# Altium PCB Sensorless_BLDC_PCB.PcbDoc
Units mm, origin at the board's own origin, x right, y up, seen from the top; angles counter-clockwise.
Board outline 92 x 49 mm, 2 copper layers (Top Layer, Bottom Layer); 49 components, 34 nets, 140 pads, 138 vias.
Unrouted connection lines stored in the file: 2.
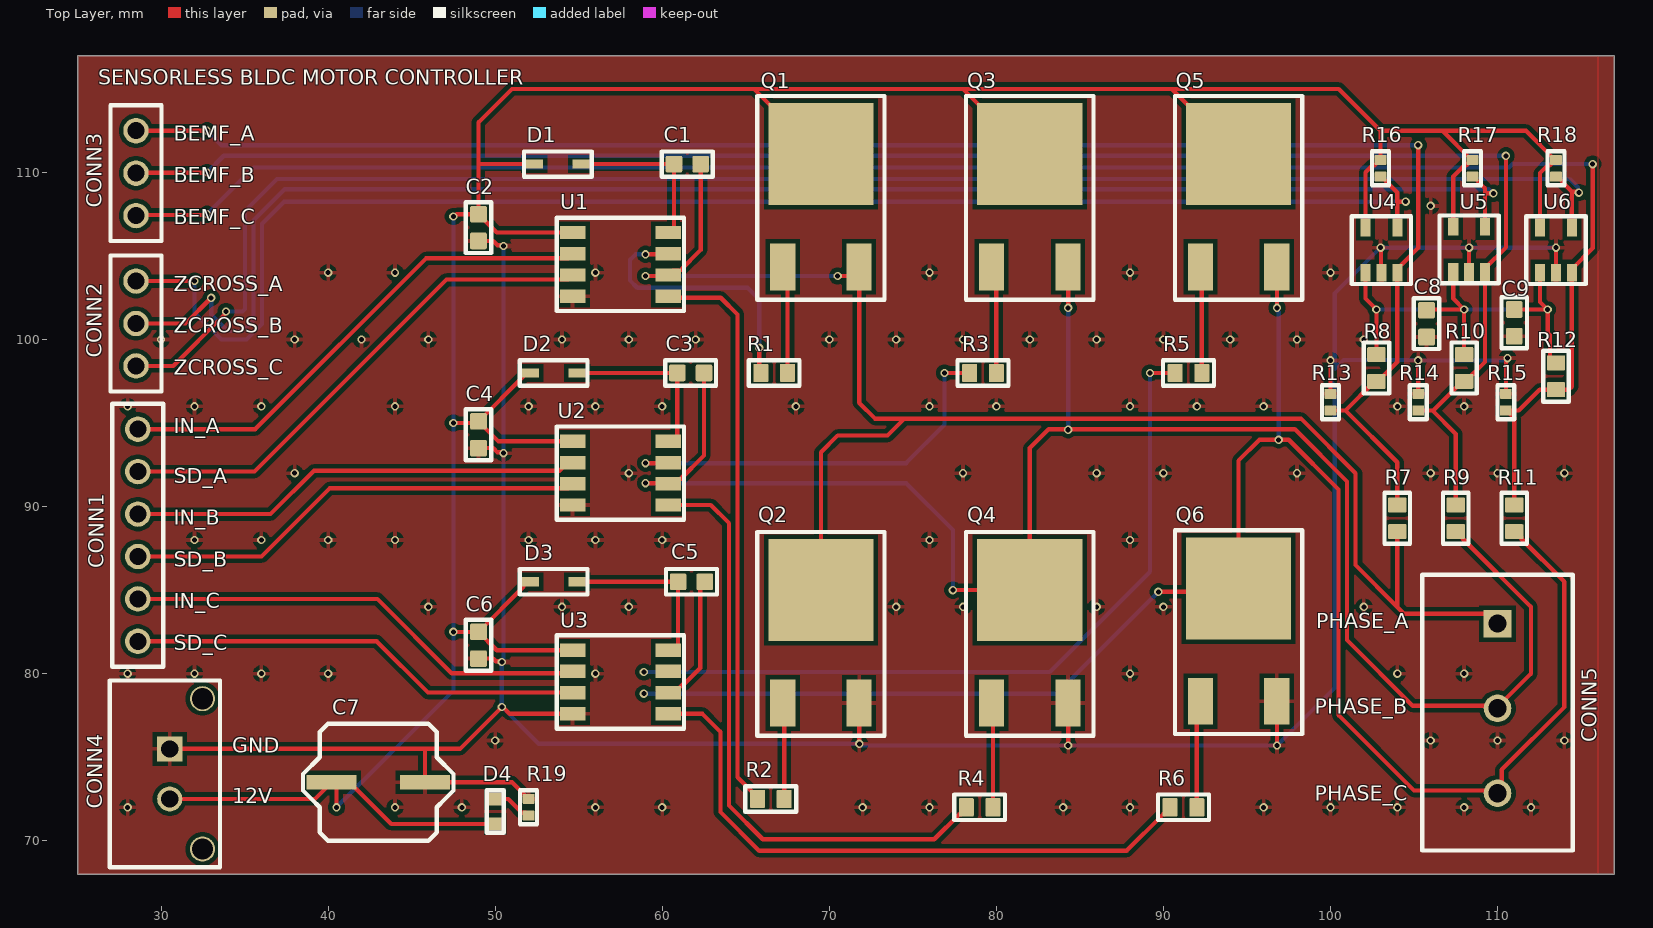
[diagram p0: Top Layer view]
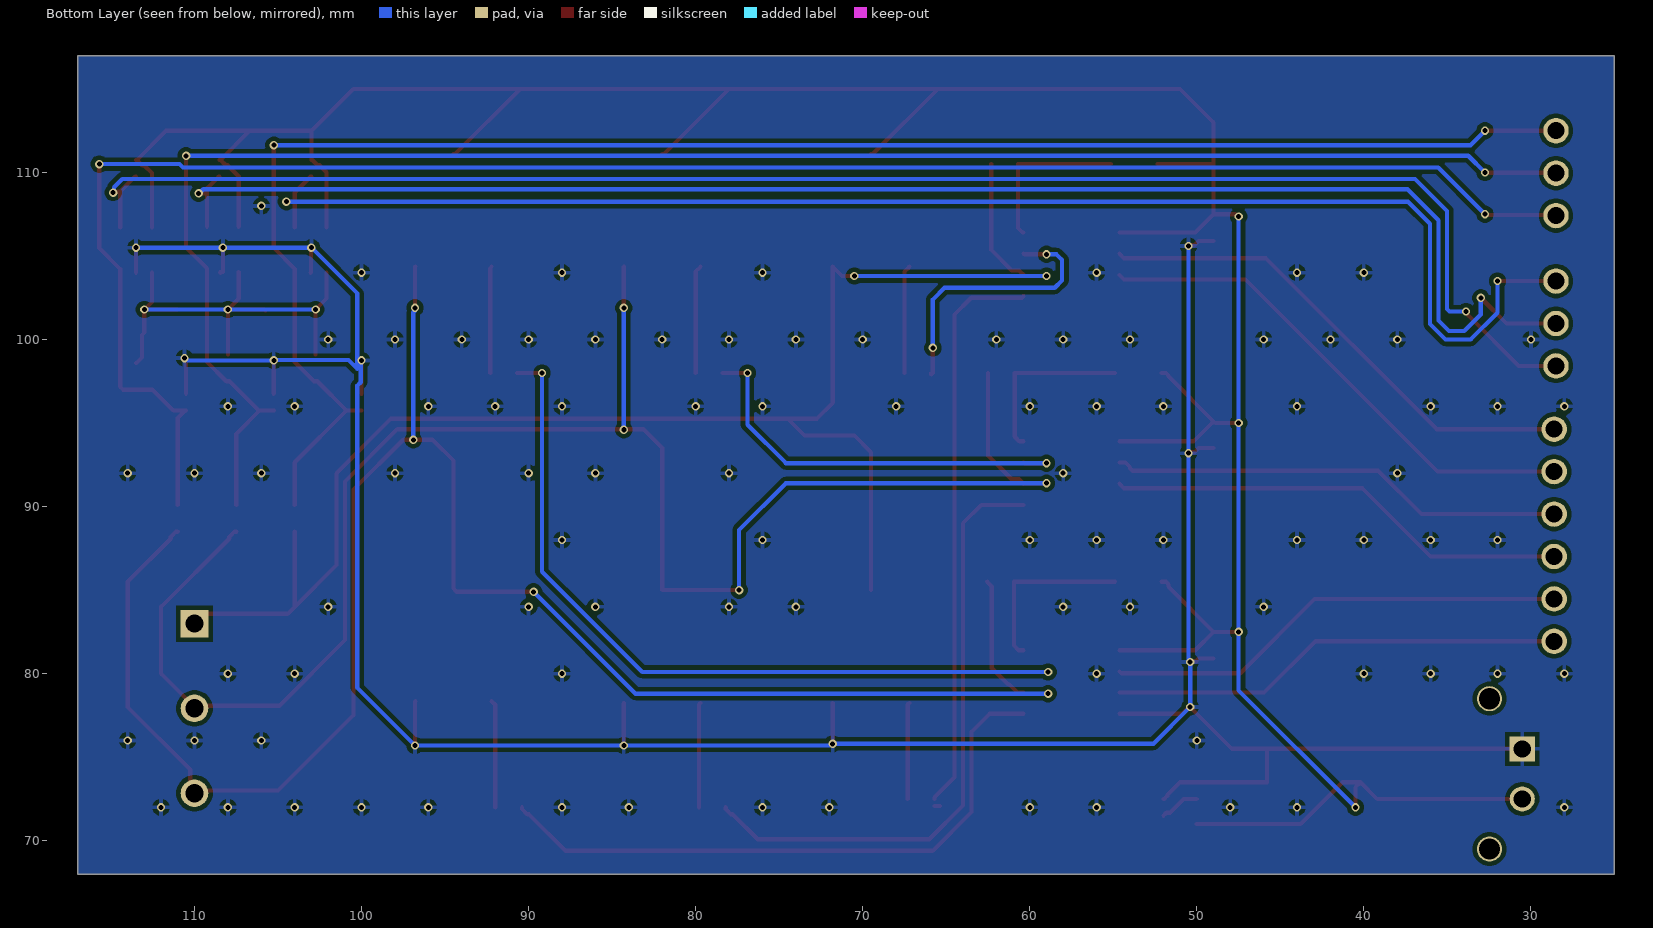
[diagram p1: Bottom Layer view, seen from below]
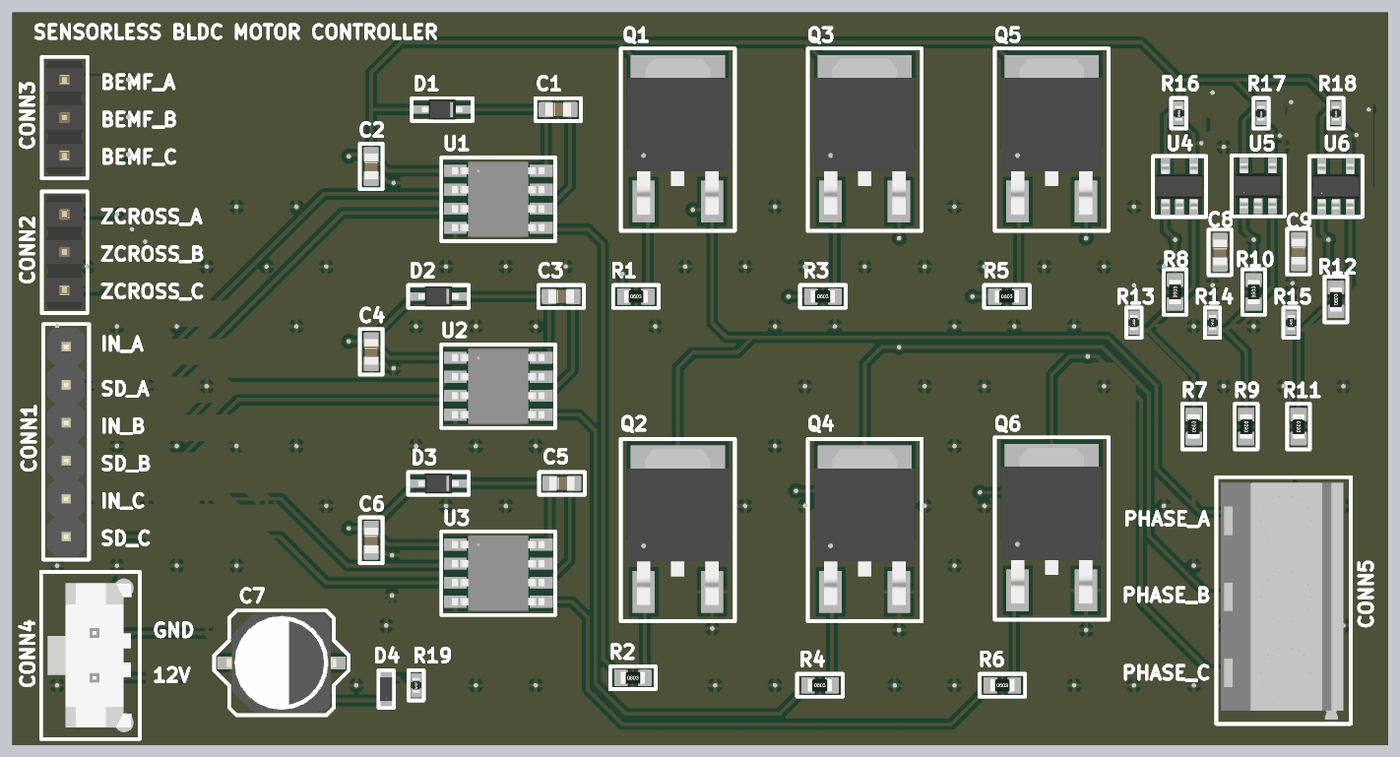
[diagram p2: 3D render of the assembled board from above, using the file's embedded part models]

## Layer stack, top to bottom
Top Solder: solder mask 0.0102, Solder Resist, Dk 3.5
Top Layer: signal copper 0.0356
Dielectric 1: dielectric 0.32, FR-4, Dk 4.8
Bottom Layer: signal copper 0.0356
Bottom Solder: solder mask 0.0102, Solder Resist, Dk 3.5

## Board outline
25,68 117,68 117,117 25,117

## Design rules (kind name [scope] priority, off if disabled: settings)
Clearance [All] p1: gap=0.254 ignorepadtopadclearanceinfootprint=FALSE except(0: Arc-Hole Track-Hole SMDPad-Hole THPad-Hole Via-Hole Fill-Hole Poly-Hole Region-Hole Text-Hole)
PolygonConnect [All] p1: connectstyle=Relief reliefconductorwidth=0.254 reliefentries=4 polygonreliefangle="90 Angle" airgapwidth=0.254
RoutingVias [All] p1: holewidth=0.711 width=1.27 viastyle="Through Hole" minholewidth=0.711 minwidth=1.27 maxholewidth=0.711 maxwidth=1.27
SolderMaskExpansion [All] p1: expansion=0.102 istentingtop=TRUE
Width [All] p1: maxlimit=0.254 minlimit=0.254 preferedwidth=0.254
30 further rules are at their usual default settings.

## Classes and differential pairs
component class ZeroCrossDetection: C8 C9 R7 R8 R9 R10 R11 R12 R13 R14 R15 R16 R17 R18 U4 U5 U6
component class HBridgeControl: C1 C2 C3 C4 C5 C6 C7 CONN1 CONN2 CONN3 CONN4 D1 D2 D3 D4 Q1 Q2 Q3 Q4 Q5 Q6 R1 R2 R3 R4 R5 R6 R19 U1 U2 U3

## Components (designator, comment, footprint, x,y, rotation, side; value= is the part's Value field where it differs from the comment)
C1 "GCM188R71E105KA64D" CAP0603 61.5,110.5 r0 top value=1μF
C2 "GRM188R61E106MA73J" CAP0603 49,106.7 r270 top value=10μF
C3 "GCM188R71E105KA64D" CAP0603 61.7,98 r0 top value=1μF
C4 "GRM188R61E106MA73J" CAP0603 49,94.3 r270 top value=10μF
C5 "GCM188R71E105KA64D" CAP0603 61.75,85.5 r0 top value=1μF
C6 "GRM188R61E106MA73J" CAP0603 49,81.7 r270 top value=10μF
C7 "EEE-1VA101XP" SMD 43,73.5 r0 top
C8 "GRM188R61E106MA73J" CAP0603 105.75,100.95 r270 top value=10μF
C9 "GRM188R61E106MA73J" CAP0603 111,101 r270 top value=10μF
CONN1 "MALE6PINCONN" "6POS HEADER" 28.608,94.633 r270 top
CONN2 "MALE3PINCONN" "3POS HEADER" 28.5,103.5 r270 top
CONN3 "MALE3PINCONN" "3POS HEADER" 28.5,112.5 r270 top
CONN4 "MALE2PINCONN" "2POS HEADER" 31.5,74 r90 top
CONN5 "SCREW3PINCONN" SCREW3POSCONN 110,77.92 r90 top
D1 "1N4148WS" SOD_323 53.75,110.5 r0 top
D2 "1N4148WS" SOD_323 53.5,98 r0 top
D3 "1N4148WS" SOD_323 53.5,85.5 r0 top
D4 "B1911PG--20D000514U1930" LED0603 50,71.75 r90 top
Q1 "IRLR7843TRPBF" "TO-252AA (DPAK)" 69.5,109.5 r0 top
Q2 "IRLR7843TRPBF" "TO-252AA (DPAK)" 69.5,83.398 r0 top
Q3 "IRLR7843TRPBF" "TO-252AA (DPAK)" 82,109.5 r0 top
Q4 "IRLR7843TRPBF" "TO-252AA (DPAK)" 82,83.398 r0 top
Q5 "IRLR7843TRPBF" "TO-252AA (DPAK)" 94.5,109.5 r0 top
Q6 "IRLR7843TRPBF" "TO-252AA (DPAK)" 94.5,83.5 r0 top
R1 "RC0402JR-0710KL_1" RES0603 66.7,98 r0 top value=100Ω
R2 "RC0402JR-0710KL_1" RES0603 66.5,72.5 r0 top value=100Ω
R3 "RC0402JR-0710KL_1" RES0603 79.2,98 r0 top value=100Ω
R4 "RC0402JR-0710KL_1" RES0603 79,72 r0 top value=100Ω
R5 "RC0402JR-0710KL_1" RES0603 91.5,98 r0 top value=100Ω
R6 "RC0402JR-0710KL_1" RES0603 91.2,72 r0 top value=100Ω
R7 "RT0603BRD0733KL" RES0603 104,89.3 r90 top value=33kΩ
R8 "RT0603BRD0733KL" RES0603 102.75,98.3 r90 top value=33kΩ
R9 "RT0603BRD0733KL" RES0603 107.5,89.3 r90 top value=33kΩ
R10 "RT0603BRD0733KL" RES0603 108,98.3 r90 top value=33kΩ
R11 "RT0603BRD0733KL" RES0603 111,89.3 r90 top value=33kΩ
R12 "RT0603BRD0733KL" RES0603 113.5,97.8 r90 top value=33kΩ
R13 "RC0402JR-0710KL" RES0402 100,96.25 r90 top value=10kΩ
R14 "RC0402JR-0710KL" RES0402 105.25,96.25 r90 top value=10kΩ
R15 "RC0402JR-0710KL" RES0402 110.5,96.25 r90 top value=10kΩ
R16 "RC0402JR-0710KL" RES0402 103,110.25 r90 top value=10kΩ
R17 "RC0402JR-0710KL" RES0402 108.5,110.25 r90 top value=10kΩ
R18 "RC0402JR-0710KL" RES0402 113.5,110.25 r90 top value=10kΩ
R19 "RC0402JR-0710KL" RES0402 52,72 r90 top value=10kΩ
U1 "DGD2104MS8-13" 8SO 57.5,104.5 r0 top
U2 "DGD2104MS8-13" 8SO 57.5,92 r0 top
U3 "DGD2104MS8-13" 8SO 57.5,79.5 r0 top
U4 "LM393DR" SOT25 103.05,105.354 r90 top
U5 "LM393DR" SOT25 108.3,105.396 r90 top
U6 "LM393DR" SOT25 113.5,105.354 r90 top

## Footprints (in the part's own frame and the unit in brackets; to place one, negate y for a bottom-side part, rotate by r counter-clockwise, add the part's x,y. Pads: shape width x height; smd on the part's side, far side on the other; paste and mask are expansions set on the pad)
"2POS HEADER" [mm] "2 male connectors"
  round 1.5 hole 1.02: 1(-1.5,0.98)
  rect 1.5x1.5 hole 1.02: 2(1.5,0.98)
  round 1.5 hole 1.27: ""(-4.5,-0.98) ""(4.5,-0.98)
  silkscreen extent -5.59,-2.03 5.59,4.57, body extent -4.82,-1.47 4.82,4.14, height 9.95
"3POS HEADER" [mil]
  round 60 hole 40.16: 1(0,0) 2(100,0) 3(200,0)
  silkscreen extent -60,-60 260,60, body extent -50,-49 250,49, height 450
"6POS HEADER" [mil] "CONN HEADER VERT 6POS 2.54MM"
  round 60 hole 40.16: 1(0,0) 2(100,0) 3(200,0) 4(300,0) 5(400,0) 6(500,0)
  silkscreen extent -60,-60 560,60, body extent -50,-49 550,49, height 335
8SO [mil] "Surface mount IC 6.5x4.612mm"
  rect 60x31.57 smd: 1(-112.95,75) 2(-112.95,25) 3(-112.95,-25) 4(-112.95,-75) 5(112.95,-75) 6(112.95,-25) 7(112.95,25) 8(112.95,75)
  silkscreen extent -150,-110 150,110, body extent -122,-99 122,99, height 69
CAP0603 [mm] "0.063\" L x 0.031\" W (1.60mm x 0.80mm)"
  rrect20% 1x1 smd: 1(-0.8,0) 2(0.8,0)
  silkscreen extent -1.52,-0.76 1.52,0.76, body extent -0.85,-0.44 0.85,0.44, height 0.89
LED0603 [mm] "0603 LED"
  rect 0.8x0.8 smd: 1(-0.75,0) 2(0.75,0)
  silkscreen extent -1.27,-0.51 1.27,0.51, body extent -0.8,-0.41 0.8,0.41, height 0.61
RES0402 [mm] "Chip Resistor, Body 1x0.5mm, IPC Medium Density"
  rrect15% 0.6x0.7 smd: 1(-0.5,0) 2(0.5,0)
  silkscreen extent -1.02,-0.51 1.02,0.51, body extent -0.5,-0.25 0.5,0.25, height 0.27
RES0603 [mm] "Chip Resistor, Body 1.6x0.8mm, IPC Medium Density"
  rrect15% 0.9x1.1 smd: 1(-0.8,0) 2(0.8,0)
  silkscreen extent -1.52,-0.76 1.52,0.76, body extent -0.8,-0.4 0.8,0.4, height 0.46
SCREW3POSCONN [mm] "3 Position Wire to Board Terminal Block Horizontal with Board 0.200\" (5.08mm) Through Hole"
  rect 1.65x1.65 hole 1.1: 1(5.08,0)
  round 1.65 hole 1.1: 2(0,0) 3(-5.08,0)
  silkscreen extent -8.5,-4.5 8,4.5, body extent -8.22,-4 7.62,4.2, height 10.25
SMD [mm] "0.260\" L x 0.260\" W (6.60mm x 6.60mm)"
  rect 3x0.85 smd: 1(-2.794,0) 2(2.794,0)
  silkscreen extent -4.5,-3.5 4.5,3.5, body extent -3.65,-3.3 3.65,3.3, height 7.7
SOD_323 [mm] "Surface mount diode 1.05x0.55 mm"
  rect 1.05x0.55 smd: 1(-1.4,0) 2(1.4,0)
  silkscreen extent -2.03,-0.76 2.03,0.76, body extent -1.35,-0.67 1.35,0.67, height 0.89
SOT25 [mm]
  rect 1.05x0.6 smd: 1(-1.354,0.95) 2(-1.354,0) 3(-1.354,-0.95) 4(1.354,-0.95) 5(1.354,0.95)
  silkscreen extent -2.03,-1.78 2.03,1.78, body extent -1.5,-1.55 1.5,1.55, height 1.45
"TO-252AA (DPAK)" [mm] "Mofset Footprint"
  rect 1.5x2.8 smd: 1(-2.286,-5.15) 3(2.286,-5.15)
  rect 6.3x6.1 smd: 2(0,1.603)
  silkscreen extent -3.81,-7.11 3.81,5.08, body extent -3.37,-6.03 3.37,4.38, height 2.39

## Part data
C1 C3 C5: "CAP CER 1UF 25V X7R 0603", Manufacturer 1=Murata, Manufacturer Part Number 1=GCM21BR71E105KA56L, Supplier Part Number 1=490-4785-1-ND, Voltage Rating=25V, Supplier 1=Digi-Key
C2 C4 C6 C8 C9: "CAP CER 10UF 25V X5R 0603", Manufacturer 1=Murata, Manufacturer Part Number 1=GCM21BR71E105KA56L, Supplier Part Number 1=490-4785-1-ND, Voltage Rating=25V, Supplier 1=Digi-Key
C7: "CAP ALUM 100UF 20% 35V SMD", Capacitance=100uF, Voltage Rating=35V
D1 D2 D3: "DIODE GEN PURP 75V 150MA SOD323F", Manufacturer=Onsemi, Supplier Part Number=1N4148WSFSTR-ND, Manufacturer Part Number=1N4148WS, Supplier=DigiKey
D4: "LED GREEN DIFFUSED 0603 SMD"
Q1 Q2 Q3 Q4 Q5 Q6: "N-Channel 30 V 161A (Tc) 140W (Tc) Surface Mount TO-252AA (DPAK)", Manufacturer="Infineon Technologies", Supplier Part Number=IIRLR7843PBFTR-ND, Manufacturer Part Number=IRLR7843TRPBF, Supplier=DigiKey
R1 R2 R3 R4 R5 R6: "RES 100 OHM 1% 1/10W 0603", Manufacturer 1="Stackpole Electronics Inc", Manufacturer Part Number 1=RNCP0603FTD10K0, Power Rating=1/8W, Supplier Part Number 1=RNCP0603FTD10K0CT-ND, Supplier 1=Digi-Key
R7 R8 R9 R10 R11 R12: "RES SMD 33K OHM 0.1% 1/10W 0603", Manufacturer 1="Stackpole Electronics Inc", Manufacturer Part Number 1=RNCP0603FTD10K0, Power Rating=1/8W, Supplier Part Number 1=RNCP0603FTD10K0CT-ND, Supplier 1=Digi-Key
R13 R14 R15 R16 R17 R18 R19: "RES 10K OHM 5% 1/16W 0402", Manufacturer 1="Stackpole Electronics Inc", Manufacturer Part Number 1=RNCP0603FTD10K0, Power Rating=1/8W, Supplier Part Number 1=RNCP0603FTD10K0CT-ND, Supplier 1=Digi-Key
U1 U2 U3: "IC GATE DRVR HALF-BRIDGE 8-SO", Manufacturer="Diodes Incorporated", Supplier Part Number=DGD2104MS8-13DITR-ND, Manufacturer Part Number=DGD2104MS8-13, Supplier=DigiKey
U4 U5 U6: Manufacturer="Texas Instruments", Supplier Part Number=296-1015-2-ND, Manufacturer Part Number=LM393DR, Supplier=DigiKey

## Via types
v1: diameter 0.5, hole 0.3, Top Layer to Bottom Layer, tented both sides, 138 vias

## Nets (pads, with @x,y where several pads share a name; then routed paths per layer and width w, separated by ;. In a path a pad name is that pad's centre, name@x,y a point inside that pad or via, vN(x,y) a via of type N, cw(c..) or ccw(c..) an arc to the next point about the centre after c; other vN are vias at no path point)
12V: C2.1 C4.1 C6.1 C7.1 CONN4.1 D1.1 D2.1 D3.1 D4.1 Q1.2 Q3.2 Q5.2 R16.2 R17.2 R18.2 U1.1 U2.1 U3.1 U4.5 U5.5 U6.5 | length 202.9
  Top Layer w0.254: CONN4.1 39.206,72.5 C7.1 ; v1(40.5,72) 40.5,73.206 C7.1 ; v1(47.5,82.5) C6.1 ; v1(47.5,95) C4.1@48.9,95 ; v1(47.5,107.369) 47.567,107.369 47.698,107.5 C2.1 ; D4.1 43.781,71 41.281,73.5 C7.1 ; D3.1 51.85,85.5 51.702,85.352 51.702,85.202 C6.1 ; D2.1 51.85,98 51.702,97.852 51.702,97.802 C4.1 50.195,93.905 U2.1 ; D1.1 49,110.5 ; U3.1 50.095,81.405 C6.1 ; U1.1 50.095,106.405 C2.1 ; Q1.2 69.4,111.103 65.503,115 ; Q3.2 81.9,111.103 78.003,115 ; Q5.2 94.4,111.103 90.503,115 ; U4.5 102.1,110.012 102.519,110.431 102.631,110.431 102.95,110.75 R16.2 103,112.5 ; U5.5 107.35,109.762 108.019,110.431 108.131,110.431 R17.2@108.45,110.75 ; R17.2 R17.2@108.45,110.75 ; U6.5 112.55,109.962 113.019,110.431 113.131,110.431 R18.2@113.45,110.75 ; R18.2 R18.2@113.45,110.75 ; C2.1 49,110.5 ; 49,110.5 49,113 51,115 65.503,115 ; 65.503,115 69.5,115 78.003,115 ; 78.003,115 90.503,115 ; 90.503,115 100.5,115 103,112.5 ; 103,112.5 106.7,112.5 ; 106.7,112.5 111.7,112.5 R18.2@113.45,110.75 ; 106.7,112.5 R17.2@108.45,110.75
  Bottom Layer w0.254: v1(40.5,72) 47.5,79 v1(47.5,82.5) v1(47.5,107.369)
BEMF_A: CONN3.1 R7.2 R8.1 R13.1 U4.3 | length 102.7
  Top Layer w0.254: CONN3.1 v1(32.75,112.5) ; R13.1 100.9,95.75 ; R7.2 104,92.65 100.9,95.75 ; v1(105.25,111.631) 105.25,105.475 104,104.225 U4.3 104,98.65 102.85,97.5 R8.1 102.65,97.5 100.9,95.75
  Bottom Layer w0.254: v1(32.75,112.5) 33.619,111.631 v1(105.25,111.631)
BEMF_B: CONN3.2 R9.2 R10.1 R14.1 U5.3 | length 107.6
  Top Layer w0.254: CONN3.2 28.52,109.98 32.73,109.98 v1(32.75,110) ; R14.1@105.233,95.75 106.15,95.75 107.9,97.5 R10.1 108.1,97.5 109.25,98.65 U5.3 109.25,104.267 110.5,105.517 v1(110.5,111) ; R14.1 106.1,95.75 107.5,94.35 R9.2
  Bottom Layer w0.254: v1(32.75,110) 33.75,111 v1(110.5,111)
BEMF_C: CONN3.3 R11.2 R12.1 R15.1 U6.3 | length 112.7
  Top Layer w0.254: CONN3.3 28.54,107.46 32.71,107.46 v1(32.75,107.5) ; R11.2 111,95.3 110.55,95.75 R15.1 111.275,95.75 112.525,97 114.282,97 114.45,97.168 U6.3 114.45,104.225 115.7,105.475 v1(115.7,110.5)
  Bottom Layer w0.254: v1(32.75,107.5) 35.55,110.3 110.692,110.3 110.892,110.5 v1(115.7,110.5)
GND: C2.2 C4.2 C6.2 C7.2 C8.2 C9.2 CONN4.2 Q2.3 Q4.3 Q6.3 R13.2 R14.2 R15.2 R19.2 U1.4 U2.4 U3.4 U4.2 U5.2 U6.2 | length 186.4
  Top Layer w0.254: CONN4.2 45.794,75.5 ; C6.2 49.881,80.9 50.034,80.747 50.353,80.747 v1(50.4,80.7) ; C4.2 49.881,93.5 50.134,93.247 50.453,93.247 v1(50.5,93.2) ; C2.2 49.881,105.9 50.134,105.647 50.453,105.647 v1(50.5,105.6) ; R19.2 51.95,72.5 51.777,72.673 51.777,72.723 51,73.5 C7.2 45.794,75.5 ; U3.4 50.872,77.595 50.467,78 v1(50.4,78) 47.9,75.5 45.794,75.5 ; Q2.3 71.786,75.814 v1(71.8,75.8) ; Q4.3 84.3,78.234 v1(84.3,75.7) ; Q6.3 96.8,78.336 v1(96.8,75.7) ; R13.2 v1(100,98.75) ; v1(103,105.5) 103.025,105.475 103.025,104.025 U4.2 ; R14.2 v1(105.25,98.75) ; U5.2 v1(108.3,105.5) ; U5.2@108.45,104 U5.2@108.475,104.025 ; R15.2 110.5,98.723 110.6,98.822 v1(110.6,98.889) ; U6.2 v1(113.5,105.5)
  Bottom Layer w0.254: v1(50.5,105.6) v1(50.5,93.2) 50.5,80.867 50.4,80.767 v1(50.4,80.7) v1(50.4,78) 52.6,75.8 v1(71.8,75.8) 71.867,75.8 71.967,75.7 v1(84.3,75.7) v1(96.8,75.7) 100.25,79.15 100.25,97.242 100.047,97.445 100.047,98.453 ; v1(100,98.75) 100.047,98.703 100.047,98.453 ; v1(110.6,98.889) 110.533,98.889 110.394,98.75 v1(105.25,98.75) 105.225,98.775 100.775,98.775 100.25,98.25 ; v1(113.5,105.5) v1(108.3,105.5) v1(103,105.5) 100.25,102.75 100.25,98.25 ; 100.047,98.453 100.25,98.25
  other v1: 28,72 44,72 48,72 56,72 60,72 72,72 76,72 84,72 88,72 96,72 100,72 104,72 108,72 112,72 50,76 106,76 110,76 114,76 28,80 32,80 36,80 40,80 56,80 88,80 104,80 108,80 46,84 54,84 58,84 74,84 78,84 86,84 90,84 102,84 32,88 36,88 40,88 44,88 52,88 56,88 60,88 76,88 88,88 38,92 58,92 78,92 86,92 90,92 98,92 106,92 110,92 114,92 28,96 32,96 36,96 44,96 52,96 56,96 60,96 68,96 76,96 80,96 88,96 92,96 96,96 104,96 108,96 30,100 38,100 42,100 46,100 54,100 58,100 62,100 70,100 74,100 78,100 82,100 86,100 90,100 94,100 98,100 102,100 40,104 44,104 56,104 76,104 88,104 100,104 106,108
IN_A: CONN1.1 U1.2 | length 30.4
  Top Layer w0.254: CONN1.1 35.633,94.633 45.861,104.861 54.357,104.861 U1.2
IN_B: CONN1.3 U2.2 | length 27.3
  Top Layer w0.254: CONN1.3 36.553,89.553 39.147,92.147 53.847,92.147 53.996,92.296 53.996,92.361 54.27,92.635 U2.2
IN_C: CONN1.5 U3.2 | length 27.9
  Top Layer w0.254: CONN1.5 42.947,84.473 47.401,80.019 54.515,80.019 U3.2
NetC1_1: C1.1 D1.2 U1.8 | length 9.8
  Top Layer w0.254: D1.2 C1.1 60.7,106.679 60.426,106.405 U1.8
NetC1_2: C1.2 CONN5.1 Q1.3 Q2.2 R7.1 U1.6 | length 95.7
  Top Layer w0.254: v1(59,103.8) 60.304,103.8 60.643,104.139 61.075,104.139 62.3,105.364 C1.2 ; Q2.2 69.5,93.25 70.5,94.25 73.485,94.25 74.5,95.265 ; v1(70.5,103.8) 71.236,103.8 Q1.3 71.786,96.214 72.735,95.265 74.5,95.265 ; R7.1 104,84 ; CONN5.1 109.42,83.58 104.42,83.58 104,84 ; 74.5,95.265 98.235,95.265 101.5,92 101.5,86.5 104,84
  Bottom Layer w0.254: v1(59,103.8) v1(70.5,103.8)
NetC3_1: C3.1 D2.2 U2.8 | length 10.5
  Top Layer w0.254: D2.2 C3.1 60.9,94.179 60.626,93.905 U2.8
NetC3_2: C3.2 CONN5.2 Q3.3 Q4.2 R9.1 U2.6 | length 109.4
  Top Layer w0.254: v1(59,91.4) 60.334,91.4 U2.6 60.643,91.639 61.075,91.639 62.5,93.064 C3.2 ; v1(77.4,85) Q4.2 82,93.5 83.131,94.631 84.269,94.631 v1(84.3,94.6) 84.331,94.631 97.869,94.631 100.992,91.508 100.992,82.008 104.92,78.08 109.92,78.08 CONN5.2@110,78 ; Q3.3 84.3,104.336 v1(84.3,101.9) ; R9.1 107.6,88.5 107.923,88.177 107.923,88.077 112,84 112,80 CONN5.2@110,78 ; CONN5.2 CONN5.2@110,78
  Bottom Layer w0.254: v1(59,91.4) 74.6,91.4 77.4,88.6 v1(77.4,85) ; v1(84.3,94.6) v1(84.3,101.9)
NetC5_1: C5.1 D3.2 U3.8 | length 10.6
  Top Layer w0.254: D3.2 C5.1 60.95,81.679 60.676,81.405 U3.8
NetC5_2: C5.2 CONN5.3 Q5.3 Q6.2 R11.1 U3.6 | length 115.2
  Top Layer w0.254: U3.6 60.73,78.865 61.218,79.353 61.289,79.353 62.277,80.341 62.277,85.227 C5.2 ; v1(89.7,84.9) 94.297,84.9 Q6.2 94.5,92.75 95.75,94 v1(96.9,94) 97.5,94 100.484,91.016 100.484,77.516 105,73 109.84,73 CONN5.3 ; Q5.3 96.8,104.336 v1(96.8,101.9) ; CONN5.3@109.764,73.076 110.253,73.565 110.253,74.253 114,78 114,85.5 111.423,88.077 111.423,88.177 111.1,88.5 R11.1
  Bottom Layer w0.254: v1(58.9,78.8) 83.6,78.8 v1(89.7,84.9) ; v1(96.8,101.9) 96.847,101.853 96.847,101.681 96.9,101.628 v1(96.9,94)
NetCONN2_1: CONN2.1 R16.1 U4.4 | length 89.5
  Top Layer w0.254: CONN2.1 v1(32,103.5) ; U4.4 104,108.25 ; v1(104.5,108.25) 104,108.25 ; R16.1@103.05,109.75 R16.1 R16.1@103.05,109.75 ; R16.1@103.05,109.75 103.223,109.577 104,108.8 104,108.25
  Bottom Layer w0.254: v1(32,103.5) 32,101.608 33.608,100 35.111,100 36.04,100.929 36.04,106.932 37.358,108.25 v1(104.5,108.25)
NetCONN2_2: CONN2.2 R17.1 U5.4 | length 94.3
  Top Layer w0.254: CONN2.2 31.46,100.96 v1(33,102.5) ; R17.1 108.55,109.75 108.654,109.646 109.25,109.05 109.25,108.75 ; U5.4 109.25,108.75 ; v1(109.75,108.75) 109.25,108.75
  Bottom Layer w0.254: v1(33,102.5) 33,101.5 33.992,100.508 34.9,100.508 35.532,101.139 35.532,107.142 37.389,109 109.478,109 109.728,108.75 v1(109.75,108.75)
NetCONN2_3: CONN2.3 R18.1 U6.4 | length 98.9
  Top Layer w0.254: CONN2.3 30.727,98.42 33.765,101.459 33.765,101.486 33.888,101.609 v1(33.888,101.676) ; R18.1 113.55,109.75 114.45,108.85 ; U6.4 114.45,108.75 114.45,108.85 ; v1(114.869,108.797) 114.822,108.844 114.456,108.844 114.45,108.85
  Bottom Layer w0.254: v1(33.888,101.676) 34.875,101.676 35.024,101.824 35.024,107.688 36.947,109.612 114.322,109.612 114.822,109.112 114.822,108.844 v1(114.869,108.797)
NetD4_2: D4.2 R19.1 | length 2.4
  Top Layer w0.254: D4.2 50.781,72.5 51.608,71.673 51.827,71.673 R19.1
NetQ1_1: Q1.1 R1.2 | length 6.5
  Top Layer w0.254: Q1.1 67.5,104.064 R1.2
NetQ2_1: Q2.1 R2.2 | length 5.8
  Top Layer w0.254: Q2.1 67.3,78.161 R2.2
NetQ3_1: Q3.1 R3.2 | length 6.5
  Top Layer w0.254: Q3.1 80,104.064 R3.2
NetQ4_1: Q4.1 R4.2 | length 6.3
  Top Layer w0.254: Q4.1 79.8,78.161 R4.2
NetQ5_1: Q5.1 R5.2 | length 6.4
  Top Layer w0.254: Q5.1 92.3,104.264 R5.2
NetQ6_1: Q6.1 R6.2 | length 6.4
  Top Layer w0.254: R6.2 92,78.136 Q6.1
NetR1_1: R1.1 U1.7 | length 16.5
  Top Layer w0.254: v1(59,105.1) 60.334,105.1 U1.7 ; v1(65.8,99.5) 65.8,98 65.9,97.9 R1.1
  Bottom Layer w0.254: v1(59,105.1) 58.4,105.1 58.069,104.769 58.069,103.539 58.508,103.1 65.1,103.1 65.8,102.4 v1(65.8,99.5)
NetR2_1: R2.1 U1.5 | length 34.4
  Top Layer w0.254: U1.5 60.464,102.5 63.5,102.5 64.5,101.5 64.5,73.8 65.7,72.6 R2.1 ; R2.1@65.377,72.077 R2.1@65.7,72.077
NetR3_1: R3.1 U2.7 | length 24.8
  Top Layer w0.254: v1(59,92.6) 60.334,92.6 U2.7 ; v1(76.9,98) R3.1
  Bottom Layer w0.254: v1(59,92.6) 74.6,92.6 76.9,94.9 v1(76.9,98)
NetR4_1: R4.1 U2.5 | length 36.9
  Top Layer w0.254: U2.5 62.905,90.095 63.992,89.008 63.992,72.108 66.014,70.086 76.286,70.086 77.777,71.577 77.877,71.577 78.2,71.9 R4.1
NetR5_1: R5.1 U3.7 | length 46.2
  Top Layer w0.254: v1(89.2,98) R5.1
  Bottom Layer w0.254: v1(58.9,80.1) 83.2,80.1 89.2,86.1 v1(89.2,98)
NetR6_1: R6.1 U3.5 | length 37.4
  Top Layer w0.254: U3.5 62.405,77.595 63.484,76.516 63.484,71.716 65.8,69.4 87.8,69.4 89.977,71.577 90.077,71.577 90.4,71.9 R6.1
SD_A: CONN1.2 U1.3 | length 30.9
  Top Layer w0.254: CONN1.2 35.593,92.093 47.091,103.591 54.357,103.591 U1.3
SD_B: CONN1.4 U2.3 | length 27.8
  Top Layer w0.254: CONN1.4 36.013,87.013 40.091,91.091 54.357,91.091 U2.3
SD_C: CONN1.6 U3.3 | length 27.3
  Top Layer w0.254: CONN1.6 42.907,81.933 45.975,78.865 U3.3
VIRTUAL_N: C8.1 C9.1 R8.2 R10.2 R12.2 U4.1 U5.1 U6.1 | length 30.7
  Top Layer w0.254: U4.1 102.1,102.45 v1(102.75,101.8) R8.2 ; C8.1 105.8,101.8 v1(108,101.8) ; U5.1 107.35,102.45 v1(108,101.8) ; R10.2 v1(108,101.8) ; C9.1 v1(113,101.8) ; U6.1 112.55,102.25 v1(113,101.8) ; R12.2 113.467,98.6 113.144,98.923 113.144,100.27 113,100.415 v1(113,101.8)
  Bottom Layer w0.254: v1(102.75,101.8) v1(108,101.8) v1(113,101.8)
pads on no net: CONN4.

## Polygon pours and split planes (outlines as drawn)
GND on Top Layer "NONET_L01_P-001" (solid, pour order 2): 25,117 117,117 117,68 25,68
GND on Top Layer "NONET_L01_P001" (solid, shelved, pour order 1): 25,117 116,117 116,68 25,68
GND on Bottom Layer "GND_L02_P000" (solid, pour order 0): 25,117 117,117 117,68 25,68

## Silkscreen, mask and mechanical layers (free items; w line width, h text height)
Top Overlay:
  text "SENSORLESS BLDC MOTOR CONTROLLER" at 26.254,115.254 h0.9
  text "BEMF_A" at 30.754,111.904 h0.9
  text "BEMF_B" at 30.754,109.404 h0.9
  text "BEMF_C" at 30.754,106.904 h0.9
  text "ZCROSS_A" at 30.754,102.904 h0.9
  text "ZCROSS_B" at 30.754,100.404 h0.9
  text "ZCROSS_C" at 30.754,97.904 h0.9
  text "IN_A" at 30.754,94.404 h0.9
  text "SD_A" at 30.754,91.404 h0.9
  text "IN_B" at 30.754,88.904 h0.9
  text "SD_B" at 30.754,86.404 h0.9
  text "IN_C" at 30.754,83.904 h0.9
  text "PHASE_A" at 99.154,82.704 h0.9
  text "SD_C" at 30.754,81.404 h0.9
  text "PHASE_B" at 99.054,77.604 h0.9
  text "GND" at 34.254,75.254 h0.9
  text "PHASE_C" at 99.054,72.404 h0.9
  text "12V" at 34.254,72.254 h0.9